# Altium PCB Local Master.PcbDoc (part 2 of 2)
Units mm, origin at the board's own origin, x right, y up, seen from the top; angles counter-clockwise.
Board outline 94 x 42.5 mm, 2 copper layers (Top Layer, Bottom Layer); 184 components, 131 nets, 483 pads, 96 vias.
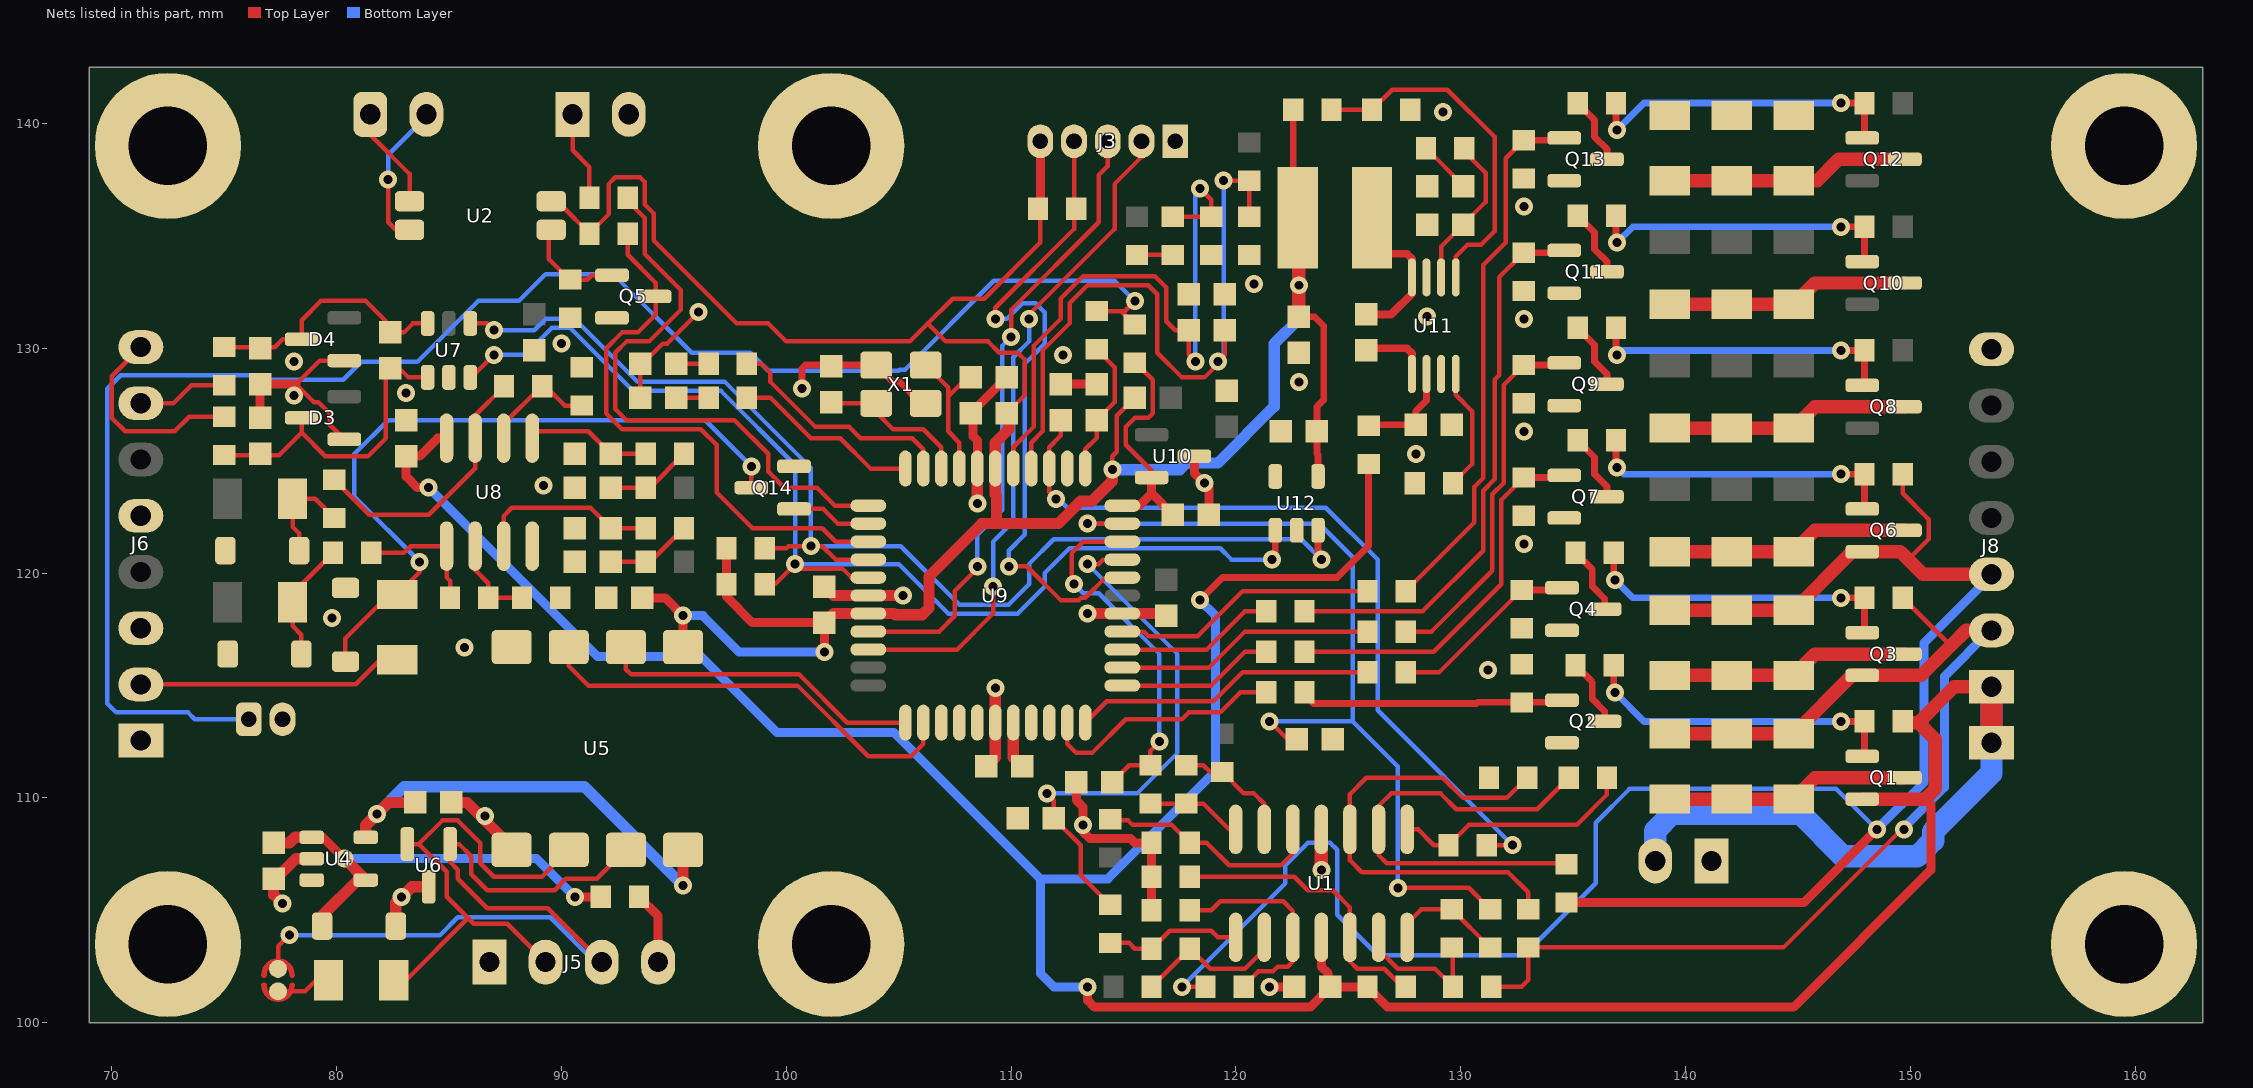
[diagram p2: the nets of this part, all layers, seen from the top]

## Via types
v1: diameter 0.8, hole 0.4, Top Layer to Bottom Layer, tented both sides, 96 vias

## Nets (pads, with @x,y where several pads share a name; then routed paths per layer and width w, separated by ;. In a path a pad name is that pad's centre, name@x,y a point inside that pad or via, vN(x,y) a via of type N, cw(c..) or ccw(c..) an arc to the next point about the centre after c; other vN are vias at no path point) (continued)
BAL4: J8.3 Q6.2 R23.1 R28.1 R29.1 R30.1 R34.2 R36.1 | length 96
  Top Layer w0.2: v1(117.6,101.6) R36.1@118.65,101.6 ; R34.2@149.65,124.4 149.65,123.55 150.8,122.4 150.8,121.5 149.9,120.6
  Top Layer w0.4: R23.1@134.7,105.35 145.25,105.35 v1(148.5,108.6)
  Top Layer w0.6: R28.1@139.3,118.35 R30.1@144.8,118.35 ; R29.1@142.05,118.35 R30.1@144.8,118.35 ; J8.3@153.6,119.95 150.55,119.95 149.9,120.6 149.55,120.95 Q6.2@147.85,120.95 147.4,120.95 R30.1@144.8,118.35
  Bottom Layer w0.2: v1(117.6,101.6) 122.2,106.2 122.2,107 123.2,108 124.2,108 124.5,107.7 124.5,104.8 126.3,103 132.8,103 136,106.2 136,108.9 137.5,110.4 146.7,110.4 v1(148.5,108.6)
  Bottom Layer w0.4: v1(148.5,108.6) 150.6,110.7 150.6,116.9 J8.3@153.625,119.925
BAL5: J8.2 Q3.2 R5.1 R11.1 R12.1 R13.1 R17.1 R18.2 | length 52.1
  Top Layer w0.2: R5.1@131.35,101.6 132.7,101.6 133,101.9 R17.1@133,103.35 144.35,103.35 149.6,108.6 v1(149.7,108.6) ; R18.2@149.65,118.9 151.76,116.79 151.81,116.79
  Top Layer w0.6: R11.1@139.3,112.85 R12.1@142.05,112.85 R13.1@145.05,112.85 ; R13.1@144.8,112.85 147.4,115.45 Q3.2@147.85,115.45 150.469,115.45 151.81,116.79 152.469,117.45 J8.2@153.6,117.45
  Bottom Layer w0.4: v1(149.7,108.6) 149.7,108.669 151.5,110.469 151.5,115.4 153.525,117.425 J8.2@153.625,117.425
BAL6: C7.1 C17.1 J8.0 J8.1 J9.2 Q1.2 R1.1 R3.2 R110.1 U1.4 U8.8 | length 159
  Top Layer w0.3: v1(118.4,118.8) 119.4,119.8 124.5,119.8 125.9,121.2 R110.1@125.9,124.85
  Top Layer w0.4: v1(84.1,123.8) 83.6,123.8 83.1,124.3 C17.1@83.1,125.2 83.7,125.2 84.5,126 U8.8@84.895,126 ; v1(113.4,101.6) 113.4,101 113.7,100.7 123.3,100.7 C7.1@124.2,101.6 ; U1.4@123.8,103.8 123.8,102.5 124.1,102.2 124.1,101.6 C7.1@124.2,101.6 ; 150.65,109.95 150.9,109.7 150.9,106.8 144.8,100.7 126.75,100.7 R1.1@125.85,101.6 C7.1@124.2,101.6
  Top Layer w0.6: Q1.2@147.85,109.95 150.65,109.95 151.1,110.4 151.1,112.6 150.35,113.35 ; R3.2@149.65,113.4 149.7,113.35 150.35,113.35 ; J8.1@153.6,114.95 151.95,114.95 150.35,113.35
  Top Layer w1: J8.0@153.6,112.45 J8.1@153.6,114.95
  Bottom Layer w0.4: v1(84.1,123.8) 91.6,116.3 96.2,116.3 99.6,112.9 104.8,112.9 111.3,106.4 ; v1(113.4,101.6) 111.9,101.6 111.3,102.2 111.3,106.4 ; v1(118.4,118.8) 119.1,118.1 119.1,111.2 114.3,106.4 111.3,106.4
  Bottom Layer w1: J9.2@138.65,107.2 138.65,108.55 139.4,109.3 145.1,109.3 147,107.4 150.3,107.4 151,108.1 151,108.5 153.6,111.1 J8.0@153.6,112.45 J8.1@153.6,114.95
CANH: J4.2 J5.3 U5.7 U6.1 | length 36.3
  Top Layer w0.2: J4.2@77.4,102.4 77.4,102.75 77.4,103.4 v1(77.9,103.9) ; J5.3@91.8,102.7 89.4,105.1 86.7,105.1 85.4,106.4 85.4,106.8 85.05,107.15 U6.1@85.05,107.95 85.45,107.95 86,107.4 86,106.6 86.7,105.9 89.7,105.9 90.2,106.4 91.579,106.4 U5.7@92.87,107.691
  Bottom Layer w0.2: v1(77.9,103.9) 84.6,103.9 85.4,104.7 89.5,104.7 91.5,102.7 J5.3@91.8,102.7
CANL: J5.2 R91.1 U5.6 U6.2 | length 22.5
  Top Layer w0.2: R91.1@82.55,101.9 83.1,101.9 85.8,104.6 ; U6.2@83.15,107.95 83.664,107.95 ; J5.2@89.3,102.7 87.6,104.4 86.1,104.4 84.9,105.6 84.9,106.714 83.664,107.95 ; U5.6@90.33,107.691 89.139,106.5 87,106.5 86.4,107.1 86.4,108 85.4,109 84.714,109 83.664,107.95
CANPWR: J5.4 R39.2 | length 3.3
  Top Layer w0.4: R39.2@93.45,105.6 94.3,104.75 J5.4@94.3,102.7
CANRX: U5.2 U9.1 | length 14.4
  Top Layer w0.2: U5.2@92.87,116.708 92.87,115.73 93.1,115.5 100.566,115.5 102.716,113.35 U9.1@105.3,113.35
CANTX: U5.3 U9.2 | length 19.5
  Top Layer w0.2: U5.3@90.33,116.708 90.33,115.87 91.2,115 100.5,115 103.65,111.85 105.55,111.85 106.1,112.4 U9.2@106.1,113.35
CGND: C8.2 C11.2 D2.2 J5.1 U4.2 U5.5 U6.3 | length 9.8
  Top Layer w0.5: C8.2@77.2,106.4 C8.2@77.2,106.3 ; v1(77.6,105.3) 77.2,105.7 C8.2@77.2,106.3 ; U4.2@78.9,107.3 78.2,107.3 C8.2@77.2,106.3 ; D2.2@82.638,104.3 82.638,105.338 v1(82.9,105.6) 83.35,106.05 U6.3@84.1,106.05 ; C11.2@85.1,109.8 85.8,109.8 87.79,107.81 U5.5@87.79,107.691
  other v1: 86.6,109.2
CHASSIS1: H1.1
CHASSIS2: H2.1
CHASSIS3: H3.1
CHASSIS4: H4.1
CHASSIS5: H5.1
CHASSIS6: H6.1
CHGENABLE: F10.2 J6.2 | length 11.9
  Top Layer w0.2: J6.2@71.3,115.05 80.85,115.05 81.95,116.15 F10.2@82.7,116.15
CHGENABLEDRV: Q14.1 U9.35 | length 3.6
  Top Layer w0.2: Q14.1@100.35,122.85 101.65,122.85 102.3,122.2 U9.35@103.65,122.2
CVDD: C11.1 U4.5 U5.8 | length 20.7
  Top Layer w0.5: U4.5@81.3,108.25 81.3,108.787 82.313,109.8 C11.1@83.5,109.8 ; v1(95.41,106.11) U5.8@95.41,107.691
  Bottom Layer w0.5: v1(81.806,109.294) 83.013,110.5 91.02,110.5 v1(95.41,106.11)
GND: C1.2 C2.2 C3.2 C6.2 C7.2 C9.2 C10.2 C12.2 C13.1 C14.2 C16.2 C17.2 C18.2 C19.2 C20.2 C21.2 C22.1 C23.1 C24.2 C25.2 C26.2 C27.2 C28.2 C29.2 C30.2 C32.2 C33.2 C34.1 C35.2 C36.2 D3.1 D4.1 D5.2 D6.2 D7.2 D8.1 D9.1 J1.2 J3.1 J6.1 J6.3 J6.5 J7.2 J8.7 J9.1 Q2.2 Q4.2 Q5.2 Q7.2 Q9.2 Q11.2 Q13.2 Q14.2 R7.1 R9.1 R24.1 R25.1 R26.1 R40.1 R48.1 R54.1 R64.1 R69.1 R82.1 R83.1 R84.1 R85.1 R86.1 R87.1 R101.1 R106.1 R113.1 R114.1 U1.11 U5.4 U7.2 U8.4 U9.6 U9.16 U9.29 U9.39 U10.3 U11.7 U12.2 X1.2 X1.4 | length 57
  Top Layer w0.2: v1(78.1,127.9) 78.1,128.3 78.2,128.4 ; D3.1@80.35,125.95 79.7,126.6 79.7,127.1 79.2,127.6 79,127.6 78.2,128.4 ; D4.1@80.35,129.45 79.25,129.45 78.2,128.4 ; D9.1@93.5,127.8 93.5,129.2 94.5,130.2 94.7,130.2 v1(96.1,131.6)
  Top Layer w0.3: v1(100.7,128.2) 100.7,129.1 100.85,129.25 X1.4@104,129.25 ; C23.1@102,129.2 102.05,129.25 X1.4@104,129.25 ; X1.2@106.2,127.55 106,127.55 105.05,128.5 104.75,128.5 X1.4@104,129.25
  Top Layer w0.4: C13.1@76.6,126.9 C16.2@76.6,128.4 78.2,128.4 ; C27.2@108.2,127.1 C22.1@109.8,128.7 ; C27.2@108.3,127.1 108.3,126.1 108.5,125.9 U9.29@108.5,124.65 ; C2.2@112.2,128.4 C30.2@113.8,128.4 ; C6.2@112.9,110.7 112.9,109.9 113.194,109.606 v1(113.194,108.792) 113.194,108.506 113.5,108.2 115.3,108.2 115.5,108 R64.1@116.25,108 R7.1@116.25,106.5 R48.1@116.25,105 ; U10.3@118.15,125.2 118.15,124.45 v1(118.6,124) 118.8,123.8 C25.2@118.8,122.6 ; v1(121.5,101.6) C7.2@122.6,101.6
  Top Layer w0.5: C28.2@101.7,119.4 102.1,119 U9.39@103.65,119 v1(105.2,119) ; v1(108.5,123.1) U9.29@108.5,124.65 ; C26.2@108.9,111.4 109.3,111.8 U9.6@109.3,113.35 v1(109.3,114.9) ; v1(113.4,118.2) U9.16@114.95,118.2 116.8,118.2 C29.2@116.9,118.1
  Top Layer w0.6: v1(123.8,106.8) U1.11@123.8,108.6
  other v1: 131.2,115.7 85.7,116.7 79.8,118 132.8,121.3 89.2,123.9 128,125.3 132.8,126.3 83.1,128 122.8,128.5 78.1,129.4 112.3,129.7 90,130.2 132.8,131.3 128.5,131.4 120.8,132.85 132.8,136.3 129.2,140.5
I2CCLK: R92.1 U7.3 U9.38 U12.1 | length 52.7
  Top Layer w0.2: U7.3@85.95,128.7 86,128.7 v1(87,129.7) ; R92.1@99.05,119.5 99.5,119.5 v1(100.4,120.4) 100.6,120.2 102.5,120.2 102.9,119.8 U9.38@103.65,119.8
  Top Layer w0.3: v1(121.6,120.6) 121.75,120.75 U12.1@121.75,121.9
  Bottom Layer w0.2: v1(87,129.7) 88.377,129.7 89.577,130.9 90.4,130.9 93.2,128.1 97.1,128.1 100.4,124.8 v1(100.4,120.4) 105,120.4 107.2,118.2 110.3,118.2 111.5,119.4 111.5,120 112.6,121.1 119.3,121.1 119.8,120.6 v1(121.6,120.6)
I2CDAT: R93.1 U7.4 U9.37 U12.3 | length 53.8
  Top Layer w0.2: U7.4@85.95,131.1 86.7,131.1 v1(87,130.8) ; R93.1@99.05,121.1 100,121.1 100.1,121.2 v1(101.1,121.2) 101.6,121.2 102.2,120.6 U9.37@103.65,120.6
  Top Layer w0.3: U12.3@123.65,121.9 123.65,120.75 v1(123.8,120.6)
  Bottom Layer w0.2: v1(87,130.8) 88.8,130.8 89.3,131.3 90.6,131.3 93.4,128.5 97.277,128.5 101.1,124.677 v1(101.1,121.2) 105.1,121.2 107.7,118.6 109.9,118.6 110.8,119.5 110.8,120.4 111.9,121.5 122.9,121.5 v1(123.8,120.6)
ICSPCLK: J3.2 U9.42 | length 29.9
  Top Layer w0.2: U9.42@103.65,116.6 107.6,116.6 109.2,118.2 v1(109.2,119.4) ; v1(110.8,131.3) 110.8,131.5 114.6,135.3 114.6,137.3 115.8,138.5 J3.2@115.8,139.2
  Bottom Layer w0.2: v1(109.2,119.4) 109.2,121.4 110.1,122.3 110.1,129.6 110.8,130.3 v1(110.8,131.3)
ICSPDAT: J3.3 U9.41 | length 28.2
  Top Layer w0.2: U9.41@103.65,117.4 106.8,117.4 107.5,118.1 107.5,119.2 108.5,120.2 v1(108.5,120.3) ; v1(110,130.5) 110,131.7 113.9,135.6 113.9,137.7 114.3,138.1 J3.3@114.3,139.2
  Bottom Layer w0.2: v1(108.5,120.3) 108.5,121.7 109.6,122.8 109.6,130.1 v1(110,130.5) ; v1@109.9,130.6 v1@110,130.7
LEDG: R107.1 U9.33 | length 8.4
  Top Layer w0.2: R107.1@98.25,127.8 99.3,127.8 101.1,126 102.4,126 103.75,124.65 U9.33@105.3,124.65
LEDR: R108.1 U9.32 | length 10.5
  Top Layer w0.2: R108.1@98.25,129.3 98.9,129.3 99.3,128.9 99.3,128.5 101.3,126.5 102.8,126.5 103.3,126 105.6,126 106.1,125.5 U9.32@106.1,124.65
LOADEN1: R81.2 U9.15 | length 11.8
  Top Layer w0.2: U9.15@114.95,117.4 115.9,117.4 116.1,117.2 118.3,117.2 120.3,119.2 R81.2@125.85,119.2
LOADEN2: R68.2 U9.14 | length 7.1
  Top Layer w0.2: U9.14@114.95,116.6 118.7,116.6 120.4,118.3 R68.2@121.35,118.3
LOADEN3: R52.2 U9.13 | length 11.6
  Top Layer w0.2: U9.13@114.95,115.8 118.8,115.8 120.4,117.4 R52.2@125.85,117.4
LOADEN4: R37.2 U9.12 | length 7
  Top Layer w0.2: U9.12@114.95,115 118.9,115 120.4,116.5 R37.2@121.35,116.5
LOADEN5: R22.2 U9.11 | length 13.5
  Top Layer w0.2: U9.11@113.3,113.35 114.25,114.3 119,114.3 120.3,115.6 R22.2@125.85,115.6
LOADEN6: R6.2 U9.10 | length 11.1
  Top Layer w0.2: U9.10@112.5,113.35 112.5,112.4 112.9,112 113.6,112 115.1,113.5 117.6,113.5 117.9,113.8 119.3,113.8 120.2,114.7 R6.2@121.35,114.7
M\C\L\R\: J3.4 R56.1 U9.18 | length 30.1
  Top Layer w0.2: v1(109.3,131.3) 109.3,131.8 112.8,135.3 112.8,136.1 R56.1@112.9,136.2 ; v1(109.9,120.3) 110.7,120.3 112.2,118.8 113.01,118.8 113.11,118.9 113.3,118.9 114.2,119.8 U9.18@114.95,119.8 ; R56.1@112.8,136.2 J3.4@112.8,139.2
  Bottom Layer w0.2: v1(109.3,131.3) 109.81,131.3 110.51,132 111.09,132 111.5,131.59 111.5,130.2 110.6,129.3 110.6,121.7 109.9,121 v1(109.9,120.3)
NetC4_1: C4.1 U11.1 | length 3.1
  Top Layer w0.35: C4.1@125.8,129.9 125.9,130 127.6,130 127.825,129.775 U11.1@127.825,128.85
NetC4_2: C4.2 L2.1 U11.8 | length 7.1
  Top Layer w0.35: C4.2@125.8,131.5 126.9,131.5 127.825,132.425 U11.8@127.825,133.15 127.825,133.975 127.6,134.2 126.6,134.2 126.05,134.75 L2.1@126.05,135.8
NetC8_1: C8.1 D2.1 R39.1 U4.1 U4.4 | length 20.2
  Top Layer w0.4: U4.1@78.9,108.25 79.4,108.25 v1(80.35,107.3) ; v1(90.6,105.6) R39.1@91.75,105.6
  Top Layer w0.5: C8.1@77.2,108 77.9,108 78.15,108.25 U4.1@78.9,108.25 ; D2.1@79.362,104.3 79.362,104.762 80.95,106.35 U4.4@81.3,106.35 v1(80.35,107.3)
  Bottom Layer w0.4: v1(80.35,107.3) 88.9,107.3 v1(90.6,105.6)
NetC13_2: C13.2 C15.1 D3.3 R95.2 U7.1 | length 13.9
  Top Layer w0.2: R95.2@75,125.25 77.45,125.25 78.45,126.25 ; D3.3@78.45,126.9 78.45,126.25 ; U7.1@83.85,128.7 83.2,128.7 82.8,129.1 82.2,129.1 82.2,126 81.4,125.2 79.5,125.2 78.45,126.25
NetC15_2: C15.2 C16.1 D4.3 R96.2 U7.6 | length 11.2
  Top Layer w0.2: R96.2@75,130.05 77.25,130.05 77.6,130.4 D4.3@78.45,130.4 78.45,131.25 79.3,132.1 81.3,132.1 82.2,131.2 82.2,130.7 83,130.7 83.4,131.1 U7.6@83.85,131.1
NetC18_1: C18.1 R99.2 R100.1 | length 3.9
  Top Layer w0.2: C18.1@92.2,120.5 R99.2@93.75,120.5 93.95,120.5 R100.1@95.45,122
NetC19_1: C19.1 R100.2 U8.3 | length 8.2
  Top Layer w0.2: U8.3@87.435,121.2 87.435,122.535 87.8,122.9 91.3,122.9 C19.1@92.2,122 R100.2@93.75,122
NetC20_1: C20.1 R104.2 R105.1 | length 3.9
  Top Layer w0.2: C20.1@92.2,123.8 93.95,123.8 R105.1@95.45,125.3
NetC21_1: C21.1 R105.2 U8.5 | length 5.6
  Top Layer w0.2: U8.5@88.705,126 89.005,126.3 91.2,126.3 C21.1@92.2,125.3 R105.2@93.75,125.3
NetC22_2: C22.2 U9.30 X1.3 | length 6.7
  Top Layer w0.2: X1.3@106.2,129.25 107.2,128.25 107.2,126.3 107.7,125.8 U9.30@107.7,124.65 ; 107.2,127.85 108.05,128.7 C22.2@108.3,128.7
NetC23_2: C23.2 U9.31 X1.1 | length 6.5
  Top Layer w0.2: C23.2@102,127.6 102.05,127.55 X1.1@104,127.55 ; X1.1@104,127.15 104.75,126.4 106.1,126.4 106.9,125.6 U9.31@106.9,124.65
NetC26_1: C26.1 U9.7 | length 2.1
  Top Layer w0.5: U9.7@110.1,113.35 110.1,111.8 C26.1@110.5,111.4
NetC33_1: C33.1 R110.2 U11.2 | length 4.6
  Top Layer w0.3: R110.2@125.9,126.55 125.95,126.6 127.1,126.6 C33.1@128,126.6 128,127.2 128.475,127.675 U11.2@128.475,128.85
NetC34_2: C34.2 R112.1 U11.6 | length 7
  Top Layer w0.2: U11.6@129.125,133.15 129.125,134.525 C34.2@130.1,135.5 131.1,136.5 131.1,137.8 130.15,138.75 R112.1@130.15,138.9
NetC35_1: C35.1 R112.2 | length 2.4
  Top Layer w0.2: R112.2@128.45,138.9 130.1,137.25 C35.1@130.1,137.2
NetD5_1: D5.1 F8.1 R98.2 | length 4.6
  Top Layer w0.2: D5.1@78.338,121 78.338,121.762 78.05,122.05 F8.1@78.05,123.3 79.05,123.3 R98.2@79.9,122.45
NetD6_1: D6.1 F9.1 R103.2 | length 5.4
  Top Layer w0.2: D6.1@78.438,116.4 78.438,117.262 78.05,117.65 F9.1@78.05,118.7 78.05,119.1 R103.2@79.85,120.9
NetD7_1: D7.1 F10.1 Q14.3 | length 32.1
  Top Layer w0.2: D7.1@80.4,116.062 80.4,117.1 82.35,119.05 F10.1@82.7,119.05 83.7,120.05 v1(83.7,120.5) ; Q14.3@98.45,123.8 v1(98.45,124.75)
  Bottom Layer w0.2: v1(83.7,120.5) 80.8,123.4 80.8,125.3 82.3,126.8 96.4,126.8 v1(98.45,124.75)
NetD8_2: D8.2 R108.2 | length 1.4
  Top Layer w0.2: D8.2@95.1,129.3 R108.2@96.55,129.3
NetD9_2: D9.2 R107.2 | length 1.4
  Top Layer w0.2: D9.2@95.1,127.8 R107.2@96.55,127.8
NetJ1_1: J1.1 R8.1 | length 4.1
  Top Layer w0.2: J1.1@90.65,140.4 90.5,140.25 90.5,138.8 91.25,138.05 R8.1@91.25,136.7
NetJ2_1: J2.1 U2.1 | length 4.7
  Top Layer w0.2: J2.1@81.65,140.4 81.5,140.25 81.5,139.5 83.25,137.75 U2.1@83.25,136.535
NetJ2_2: J2.2 U2.2 | length 6.7
  Top Layer w0.2: v1(82.3,137.5) 82.3,135.6 82.635,135.265 U2.2@83.25,135.265
  Bottom Layer w0.2: v1(82.3,137.5) 82.3,138.6 84.1,140.4 J2.2@84.15,140.4
NetJ4_1: J4.1 R91.2 | length 2.5
  Top Layer w0.2: J4.1@77.4,101.4 77.961,101.4 78.6,101.4 79.1,101.9 R91.2@79.65,101.9
NetJ7_1: J7.1 R94.2 R109.1 | length 75.1
  Top Layer w0.2: R94.2@113.8,131.65 114.9,131.65 ; R109.1@115.5,131.05 114.9,131.65 ; v1(115.5,132.1) 115.05,131.65 114.9,131.65
  Bottom Layer w0.2: J7.1@76.1,113.5 73.7,113.5 73.4,113.8 70.2,113.8 69.8,114.2 69.8,128.2 70.4,128.8 76.4,128.8 76.6,128.6 80.3,128.6 81.1,129.4 83.6,129.4 86.3,132.1 88.1,132.1 89.3,133.3 92.3,133.3 95.8,129.8 98.4,129.8 99.2,129 105,129 105.05,129.05 105.086,129.05 105.186,129.05 105.286,129.05 109.236,133 114.6,133 v1(115.5,132.1)
NetQ1_1: Q1.1 R3.1 R4.1 | length 14.5
  Top Layer w0.3: R4.1@136.8,115.9 136.8,114.75 v1(136.85,114.7) ; v1(146.9,113.4) R3.1@147.95,113.4 147.95,111.95 Q1.1@147.85,111.85
  Bottom Layer w0.3: v1(136.85,114.7) 138.15,113.4 v1(146.9,113.4)
NetQ1_3: Q1.3 R11.2 R12.2 R13.2 | length 10.8
  Top Layer w0.6: R11.2@139.3,109.95 R13.2@144.8,109.95 145.75,110.9 Q1.3@149.75,110.9
NetQ2_1: Q2.1 R6.1 R9.2 | length 11.9
  Top Layer w0.3: R6.1@123.05,114.6 123.45,114.2 130.7,114.2 130.75,114.25 R9.2@132.45,114.25 ; Q2.1@134.5,114.35 134.4,114.25 R9.2@132.7,114.25 ; R9.2@132.45,114.25 R9.2@132.7,114.25 ; R9.2@132.45,114.25 R9.2@132.7,114.25
NetQ2_3: Q2.3 R4.2 | length 3
  Top Layer w0.3: R4.2@135.1,115.9 135.85,115.15 135.85,114.4 136.4,113.85 Q2.3@136.4,113.4
NetQ3_1: Q3.1 R18.1 R19.1 | length 14.2
  Top Layer w0.3: R19.1@136.8,120.9 136.8,119.75 v1(136.85,119.7) ; v1(146.9,118.9) R18.1@147.95,118.9 147.95,117.45 Q3.1@147.85,117.35
  Bottom Layer w0.3: v1(136.85,119.7) 137.65,118.9 v1(146.9,118.9)
NetQ3_3: Q3.3 R28.2 R29.2 R30.2 | length 10.8
  Top Layer w0.6: R28.2@139.3,115.45 R29.2@142.05,115.45 R30.2@144.8,115.45 145.75,116.4 Q3.3@149.75,116.4
NetQ4_1: Q4.1 R22.1 R24.2 | length 8.5
  Top Layer w0.2: R22.1@127.55,115.6 129.05,115.6 R24.2@132.7,119.25
  Top Layer w0.3: R24.2@132.7,119.25 134.4,119.25 Q4.1@134.5,119.35
NetQ4_3: Q4.3 R19.2 | length 3
  Top Layer w0.3: R19.2@135.1,120.9 135.85,120.15 135.85,119.4 136.4,118.85 Q4.3@136.4,118.4
NetQ5_1: Q5.1 R26.2 U2.3 | length 4.3
  Top Layer w0.2: U2.3@89.45,135.065 89.45,133.95 R26.2@90.35,133.05 ; R26.2@90.4,133.05 91.15,133.05 91.35,133.25 Q5.1@92.25,133.25
NetQ6_1: Q6.1 R34.1 R35.1 | length 13.9
  Top Layer w0.3: R35.1@136.9,125.9 136.9,124.75 v1(136.95,124.7) ; v1(146.9,124.4) R34.1@147.95,124.4 147.95,122.95 Q6.1@147.85,122.85
  Bottom Layer w0.3: v1(136.95,124.7) 137.25,124.4 v1(146.9,124.4)
NetQ6_3: Q6.3 R42.2 R43.2 R44.2 | length 16.3
  Top Layer w0.6: Q6.3@149.75,121.9 145.75,121.9 R44.2@144.8,120.95 ; R44.2@144.8,120.95 R42.2@139.3,120.95 R43.2@142.05,120.95 R44.2@144.8,120.95
NetQ7_1: Q7.1 R37.1 R40.2 | length 17
  Top Layer w0.2: R37.1@123.05,116.4 123.15,116.5 128.8,116.5 131.8,119.5 131.8,123.25 R40.2@132.8,124.25
  Top Layer w0.3: R40.2@132.8,124.25 134.5,124.25 Q7.1@134.6,124.35
NetQ7_3: Q7.3 R35.2 | length 3
  Top Layer w0.3: R35.2@135.2,125.9 135.95,125.15 135.95,124.4 136.5,123.85 Q7.3@136.5,123.4
NetQ8_1: Q8.1 R50.1 R51.1 | length 13.9
  Top Layer w0.3: R51.1@136.9,130.9 136.9,129.75 v1(136.95,129.7) ; v1(146.9,129.9) R50.1@147.95,129.9 147.95,128.45 Q8.1@147.85,128.35
  Bottom Layer w0.3: v1(136.95,129.7) 137.15,129.9 v1(146.9,129.9)
NetQ8_3: Q8.3 R57.2 R58.2 R59.2 | length 10.8
  Top Layer w0.6: R57.2@139.3,126.45 R58.2@142.05,126.45 R59.2@144.8,126.45 145.75,127.4 Q8.3@149.75,127.4
NetQ9_1: Q9.1 R52.1 R54.2 | length 16.5
  Top Layer w0.2: R52.1@127.55,117.4 128.7,117.4 131.4,120.1 131.4,123.5 131.9,124 131.9,128.35 R54.2@132.8,129.25
  Top Layer w0.3: R54.2@132.8,129.25 134.5,129.25 Q9.1@134.6,129.35
NetQ9_3: Q9.3 R51.2 | length 3
  Top Layer w0.3: R51.2@135.2,130.9 135.95,130.15 135.95,129.4 136.5,128.85 Q9.3@136.5,128.4
NetQ10_1: Q10.1 R66.1 R67.1 | length 14.1
  Top Layer w0.3: R67.1@136.9,135.9 136.9,134.75 v1(136.95,134.7) ; v1(146.9,135.4) R66.1@147.95,135.4 147.95,133.95 Q10.1@147.85,133.85
  Bottom Layer w0.3: v1(136.95,134.7) 137.65,135.4 v1(146.9,135.4)
NetQ10_3: Q10.3 R70.2 R71.2 R72.2 | length 10.8
  Top Layer w0.6: R70.2@139.3,131.95 R71.2@142.05,131.95 R72.2@144.8,131.95 145.75,132.9 Q10.3@149.75,132.9
NetQ11_1: Q11.1 R68.1 R69.2 | length 24.9
  Top Layer w0.2: R68.1@123.05,118.3 128.3,118.3 131,121 131,123.666 131.5,124.166 131.5,128.6 131.7,128.8 131.7,133.15 R69.2@132.8,134.25
  Top Layer w0.3: R69.2@132.8,134.25 134.5,134.25 Q11.1@134.6,134.35
NetQ11_3: Q11.3 R67.2 | length 3
  Top Layer w0.3: R67.2@135.2,135.9 135.95,135.15 135.95,134.4 136.5,133.85 Q11.3@136.5,133.4
NetQ12_1: Q12.1 R77.1 R78.1 | length 14.3
  Top Layer w0.3: R78.1@136.9,140.9 136.9,139.75 v1(136.95,139.7) ; v1(146.9,140.9) R77.1@147.95,140.9 147.95,139.45 Q12.1@147.85,139.35
  Bottom Layer w0.3: v1(136.95,139.7) 138.15,140.9 v1(146.9,140.9)
NetQ12_3: Q12.3 R85.2 R86.2 R87.2 | length 10.8
  Top Layer w0.6: R85.2@139.3,137.45 R86.2@142.05,137.45 R87.2@144.8,137.45 145.85,137.45 146.8,138.4 Q12.3@149.75,138.4
NetQ13_1: Q13.1 R81.1 R84.2 | length 24.1
  Top Layer w0.2: R81.1@127.55,119.2 130.6,122.25 130.6,123.831 131,124.231 131,133.7 132,134.7 132,138.45 R84.2@132.8,139.25
  Top Layer w0.3: R84.2@132.8,139.25 134.5,139.25 Q13.1@134.6,139.35
NetQ13_3: Q13.3 R78.2 | length 3
  Top Layer w0.3: R78.2@135.2,140.9 135.95,140.15 135.95,139.4 136.5,138.85 Q13.3@136.5,138.4
NetR1_2: R1.2 R7.2 U1.5 | length 13
  Top Layer w0.2: R7.2@117.95,106.5 122.6,106.5 123.2,105.9 124.3,105.9 125.07,105.13 U1.5@125.07,103.8 125.07,102.73 125.4,102.4 126.6,102.4 127.4,101.6 R1.2@127.55,101.6
NetR2_1: R2.1 R10.2 U1.7 | length 5.3
  Top Layer w0.2: U1.7@127.61,103.8 127.61,104.41 128.25,105.05 R10.2@129.6,105.05 R2.1@131.3,103.35
NetR5_2: R5.2 R10.1 U1.6 | length 6.3
  Top Layer w0.2: U1.6@126.34,103.8 126.34,103.26 127.2,102.4 128.85,102.4 R5.2@129.65,101.6 129.65,103.3 R10.1@129.6,103.35
NetR14_1: R14.1 R113.2 U11.5 | length 15.8
  Top Layer w0.2: R14.1@124.25,140.6 R113.2@126.05,140.6 126.95,141.5 129.4,141.5 131.5,139.4 131.5,135.2 130.9,134.6 130.3,134.6 129.775,134.075 U11.5@129.775,133.15
NetR17_2: R17.2 R25.2 U1.10 | length 21.1
  Top Layer w0.2: R25.2@132.95,110.9 132.05,110 130.1,110 129.2,110.9 125.8,110.9 125.07,110.17 U1.10@125.07,108.6 125.07,107.23 125.6,106.7 132.1,106.7 133,105.8 R17.2@133,105.05
NetR20_1: R20.1 R27.2 U1.8 | length 10.9
  Top Layer w0.2: U1.8@127.61,108.6 128.1,108.6 128.8,107.9 R20.1@129.45,107.9 130.35,108.8 135.15,108.8 136.5,110.15 R27.2@136.5,110.9
NetR23_2: R23.2 R27.1 U1.9 | length 20.3
  Top Layer w0.2: R23.2@134.7,107.1 126.7,107.1 126.34,107.46 U1.9@126.34,108.6 126.34,109.64 126.9,110.2 129.1,110.2 129.8,109.5 133.4,109.5 R27.1@134.8,110.9
NetR36_2: R36.2 R48.2 U1.3 | length 9.9
  Top Layer w0.2: R48.2@117.95,105 118.9,105 119.3,105.4 122.1,105.4 122.53,104.97 U1.3@122.53,103.8 122.53,102.73 122.3,102.5 121.85,102.5 121.65,102.3 121,102.3 R36.2@120.3,101.6
NetR38_1: R38.1 R49.2 U1.1 | length 6.1
  Top Layer w0.2: R38.1@114.4,103.55 115.25,103.55 115.5,103.3 R49.2@116.25,103.3 117.05,104.1 118.9,104.1 119.2,103.8 U1.1@119.99,103.8
NetR41_2: R41.2 R49.1 U1.2 | length 7
  Top Layer w0.2: R41.2@116.25,101.6 R49.1@117.95,103.3 118.85,102.4 120.4,102.4 121.26,103.26 U1.2@121.26,103.8
NetR53_2: R53.2 R64.2 U1.12 | length 10.2
  Top Layer w0.2: R53.2@114.4,109 115.2,109 115.4,108.8 117.15,108.8 R64.2@117.95,108 118.7,108 119.7,107 122,107 122.53,107.53 U1.12@122.53,108.6
NetR55_1: R55.1 R65.2 U1.14 | length 4.3
  Top Layer w0.2: R55.1@116.2,109.75 R65.2@117.8,109.75 118.55,109.75 119.7,108.6 U1.14@119.99,108.6
NetR63_2: R63.2 R65.1 U1.13 | length 5.3
  Top Layer w0.2: R65.1@117.8,111.45 118.55,111.45 118.85,111.15 R63.2@119.4,111.15 120.35,110.2 120.8,110.2 121.26,109.74 U1.13@121.26,108.6
NetR76_1: R76.1 R80.2 | length 1.6
  Top Layer w0.2: R76.1@115.6,134.15 R80.2@117.2,134.15
NetR97_1: R97.1 R101.2 U8.2 | length 4
  Top Layer w0.2: U8.2@86.165,121.2 86.165,120.135 86.75,119.55 R97.1@86.75,118.9 R101.2@88.25,118.9
NetR97_2: R97.2 R103.1 U8.1 | length 5.8
  Top Layer w0.2: R103.1@81.55,120.9 83,120.9 83.3,121.2 U8.1@84.895,121.2 84.895,119.805 85.05,119.65 R97.2@85.05,118.9
NetR98_1: R98.1 R102.2 U8.7 | length 11.9
  Top Layer w0.2: R98.1@79.9,124.15 81.45,122.6 84.1,122.6 86.165,124.665 U8.7@86.165,126 86.165,127.015 R102.2@87.45,128.3
NetR102_1: R102.1 R106.2 U8.6 | length 5.1
  Top Layer w0.2: U8.6@87.435,126 87.435,126.635 89.1,128.3 R102.1@89.15,128.3 89.3,128.3 90.15,127.45 R106.2@90.9,127.45
NetR114_2: R114.2 U11.4 | length 5.5
  Top Layer w0.2: R114.2@129.65,124 130.5,124.85 130.5,127.2 129.775,127.925 U11.4@129.775,128.85
NetU4_3: U4.3
NetU9_3: U9.3
NetU9_4: U9.4
NetU9_5: U9.5
NetU9_8: U9.8
NetU9_9: U9.9
NetU9_24: U9.24
NetU11_3: U11.3
NetU12_5: U12.5
RX: Q5.3 R21.1 U9.36 | length 25.1
  Top Layer w0.2: R21.1@92.95,135.1 92.95,134.15 94.2,132.9 94.2,131.5 93.4,130.7 92.7,130.7 92,130 92,127.1 92.7,126.4 96.2,126.4 96.9,125.7 96.9,123.6 98.5,122 101.6,122 102.2,121.4 U9.36@103.65,121.4
SHUNT+: J6.8 R95.1 | length 9.2
  Top Layer w0.2: J6.8@71.3,130.05 70,128.75 70,126.9 70.6,126.3 72.8,126.3 73.45,126.95 R95.1@75,126.95
SHUNT-: J6.7 R96.1 | length 4
  Top Layer w0.2: J6.7@71.3,127.55 72.75,127.55 73.55,128.35 R96.1@75,128.35
TEMPSENSE: C30.1 R94.1 U9.23 | length 6.1
  Top Layer w0.2: U9.23@113.3,124.65 113.3,125.5 113.8,126 C30.1@113.8,126.75 ; C30.1@113.8,126.8 114.6,127.6 114.6,129.15 R94.1@113.8,129.95
TX: R8.2 U9.34 | length 25.7
  Top Layer w0.2: R8.2@92.95,136.7 92.95,136.55 93.7,135.8 93.7,134.2 95.3,132.6 95.3,131.7 93.9,130.3 92.9,130.3 92.4,129.8 92.4,127.3 92.9,126.8 97.7,126.8 99.2,125.3 99.2,124.514 99.914,123.8 101.367,123.8 102.167,123 U9.34@103.65,123
VBAT1: C9.1 R79.1 R82.2 U9.26 | length 31
  Top Layer w0.2: U9.26@110.9,124.65 110.9,125.8 111.4,126.3 111.4,129.9 112.6,131.1 112.6,132 113.4,132.8 116.1,132.8 116.5,132.4 116.5,129.8 117.6,128.7 118.6,128.7 119.2,129.3 v1(119.2,129.4) 119.5,129.7 C9.1@119.5,130.8 ; v1(119.45,137.45) R79.1@120.6,137.45 R82.2@120.6,135.85
  Bottom Layer w0.2: v1(119.2,129.4) 119.45,129.65 v1(119.45,137.45)
VBAT2: C10.1 R80.1 R83.2 U9.27 | length 28.9
  Top Layer w0.2: U9.27@110.1,124.65 110.1,125.6 111,126.5 111,130.1 112.2,131.3 112.2,132.2 113.2,133.2 116.4,133.2 116.9,132.7 116.9,131.2 117.3,130.8 C10.1@117.9,130.8 117.9,129.7 v1(118.2,129.4) ; R80.1@117.2,135.85 R83.2@118.9,135.85 118.9,136.6 v1(118.4,137.1)
  Bottom Layer w0.2: v1(118.2,129.4) 118.2,130.3 118.2,130.808 118.2,136.9 v1(118.4,137.1)
VBAT3: C6.1 R55.2 U9.20 | length 16.2
  Top Layer w0.2: v1(112.789,119.522) 112.7,119.611 112.7,120.89 113.21,121.4 U9.20@114.95,121.4 ; C6.1@114.5,110.7 115.25,111.45 R55.2@116.2,111.45 116.2,112.1 v1(116.6,112.5) v1@116.71,112.5
  Bottom Layer w0.2: v1(112.789,119.522) 113.211,119.1 113.9,119.1 116.6,116.4 v1(116.6,112.5)
VBAT4: C3.1 R38.2 U9.19 | length 24.2
  Top Layer w0.2: v1(111.6,110.2) 111.9,109.9 C3.1@111.9,109.1 ; C3.1@112,108.993 113.1,107.893 113.1,106.55 R38.2@114.4,105.25 ; v1(113.4,120.4) 113.9,120.4 114.1,120.6 U9.19@114.95,120.6
  Bottom Layer w0.2: v1(111.6,110.2) 115.6,110.2 117.4,112 117.4,116.4 v1(113.4,120.4)
VBAT5: C2.1 R20.2 U9.25 | length 35.6
  Top Layer w0.2: v1(112,123.3) 111.7,123.6 U9.25@111.7,124.65 111.7,125.6 112.2,126.1 112.2,126.7 C2.1@112.3,126.8 ; R20.2@131.15,107.9 v1(132.3,107.9)
  Bottom Layer w0.2: v1(112,123.3) 112.1,123.3 112.5,122.9 124,122.9 126.3,120.6 126.3,113.9 v1(132.3,107.9)
VBAT6: C1.1 R2.2 U9.21 | length 38.8
  Top Layer w0.2: v1(113.4,122.2) U9.21@114.95,122.2 ; v1(121.5,113.4) C1.1@122.3,112.6 ; v1(127.2,106) 130.35,106 R2.2@131.3,105.05
  Bottom Layer w0.2: v1(113.4,122.2) 123.7,122.2 125.2,120.7 125.2,113.4 ; v1(121.5,113.4) 125.2,113.4 ; v1(127.2,106) 127.2,111.4 125.2,113.4
VCC: C12.1 C27.1 C28.1 C32.1 C36.1 J3.5 L1.1 L2.2 R14.2 R21.2 R56.2 R92.2 R93.2 U2.4 U5.1 U9.28 U9.40 U12.4 | length 118.6
  Top Layer w0.2: U2.4@89.45,136.335 90.015,136.335 R21.2@91.25,135.1 92.1,135.95 92.1,137.3 92.4,137.6 93.5,137.6 93.7,137.4 93.7,136.4 94.1,136 94.1,134.8 97.8,131.1 99.2,131.1 100,130.3 105.5,130.3 106.3,131.1 ; C27.1@109.8,127.1 110.6,127.9 110.6,129.5 110.3,129.8 109.477,129.8 108.977,130.3 107.1,130.3 106.3,131.1 ; R56.2@111.2,136.2 111.3,136.1 111.3,134.7 108.8,132.2 107.4,132.2 106.3,131.1 ; v1(114.5,124.6) 114.5,125.2 114.7,125.4 114.7,127 L1.1@115.5,127.8
  Top Layer w0.3: R14.2@122.55,140.6 122.55,136 L2.2@122.75,135.8 ; C32.1@122.8,131.4 123.5,131.4 123.9,131 123.9,127.7 123.6,127.4 C36.1@123.6,126.3 123.6,125.3 123.65,125.25 U12.4@123.65,124.3
  Top Layer w0.4: C12.1@93.6,118.9 94.62,118.9 v1(95.41,118.11) U5.1@95.41,116.708 ; R93.2@97.35,121.1 R92.2@97.35,119.5 97.35,118.95 98.5,117.8 C28.1@101.7,117.8 v1(101.7,116.5) ; R56.2@111.2,136.2 111.3,136.3 J3.5@111.3,139.2
  Top Layer w0.5: C28.1@101.7,117.8 102.1,118.2 U9.40@103.65,118.2 104.798,118.2 104.848,118.15 106.05,118.15 106.35,118.45 106.35,119.85 108.7,122.2 109.35,122.2 ; C27.1@109.9,127.1 109.9,126.4 109.3,125.8 U9.28@109.3,124.65 109.3,123.502 109.35,123.452 109.35,122.2 ; v1(114.5,124.6) 114.5,124.1 113.595,123.195 113.095,123.195 112.85,122.95 112.85,122.948 112.352,122.45 112.35,122.45 112.1,122.2 109.35,122.2
  Top Layer w0.6: L2.2@122.75,135.8 122.8,135.75 v1(122.8,132.8) C32.1@122.8,131.4
  Bottom Layer w0.4: v1(95.41,118.11) 96.29,118.11 97.9,116.5 v1(101.7,116.5)
  Bottom Layer w0.5: v1(114.5,124.6) 117.5,124.6 117.8,124.9 119.2,124.9 121.7,127.4 121.7,130.2 122.8,131.3 v1(122.8,132.8)
VREF: C25.1 R109.2 U9.22 U10.2 | length 9.8
  Top Layer w0.2: R109.2@115.9,129 116.3,128.6 116.3,127.1 116.1,126.9 115.5,126.9 115.1,126.5 115.1,125.7 116.25,124.55 U10.2@116.25,124.25
  Top Layer w0.4: U9.22@114.95,123 115.7,123 116.25,123.55 ; U10.2@116.25,124.25 116.25,123.55 ; C25.1@117.2,122.6 116.25,123.55

## Polygon pours and split planes (outlines as drawn)
GND on Bottom Layer "GND" (solid, pour order 8): 69.6,109.5 103.8,109.5 106.9,106.4 107,106.3 107,100.5 162.5,100.5 162.5,142 69.6,142
CGND on Bottom Layer "GND" (solid, pour order 6): 76.5,100.5 76.5,105 81.6,110.1 90.9,110.1 97,104 97,100.5
GND on Top Layer "GND" (solid, pour order 7): 69.6,109.5 103.8,109.5 106.9,106.4 107,106.3 107,100.5 162.5,100.5 162.5,142 69.6,142

## Silkscreen, mask and mechanical layers (free items; w line width, h text height)
Top Overlay:
  lines w0.254: 74.5,107.2 77.4,104.3 77.4,103.2 ; 77,103.6 77.4,103.2 ; 77.8,103.6 77.4,103.2
  text "Kron Tech" at 154.1,133 h1.5 r90
  text "Rev 2 Jan 2021" at 155.6,133 h1.4 r90
  text "6MS Master" at 152.7,132.9 h1.85 r90
  text "-" at 160.2,132 h3
  text "CAN" at 70.2,108.6 h1
  text "+" at 160.3,107.8 h3
  text "Term" at 70.2,107.2 h1
Mechanical 1:
  lines w0.254: 81.575,112.9 79.375,110.7 75.3,110.7 ccw(c75.3,110.2) 75.3,109.7 79.8,109.7 82.287,112.187 ; 81.593,112.907 cw(c81.946,112.554) 82.3,112.2 ; 69,100 163,100 163,142.5 69,142.5 69,100 ; 80.3,135.8 ccw(c83.3,135.8) 86.3,135.8 86.3,136.7 ccw(c85.8,136.7) 85.3,136.7 85.3,135.8 cw(c83.3,135.8) 81.3,135.8 81.3,136.7 ccw(c80.8,136.7) 80.3,136.7 80.3,135.8

## Dimensions
69,100 to 163,100 on Mechanical 1
163,100 to 163,142.5 on Mechanical 1